# Altium PCB Headstage_Mainboard.PcbDoc
Units mil, origin at the board's own origin, x right, y up, seen from the top; angles counter-clockwise.
Board outline 4600 x 5400 mil, 4 copper layers (Top Copper Layer, Internal Copper Layer 1, Internal Copper Layer 2, Bottom Copper Layer), stack 62.205 mil thick; 16 components, 104 nets, 236 pads, 19 vias.
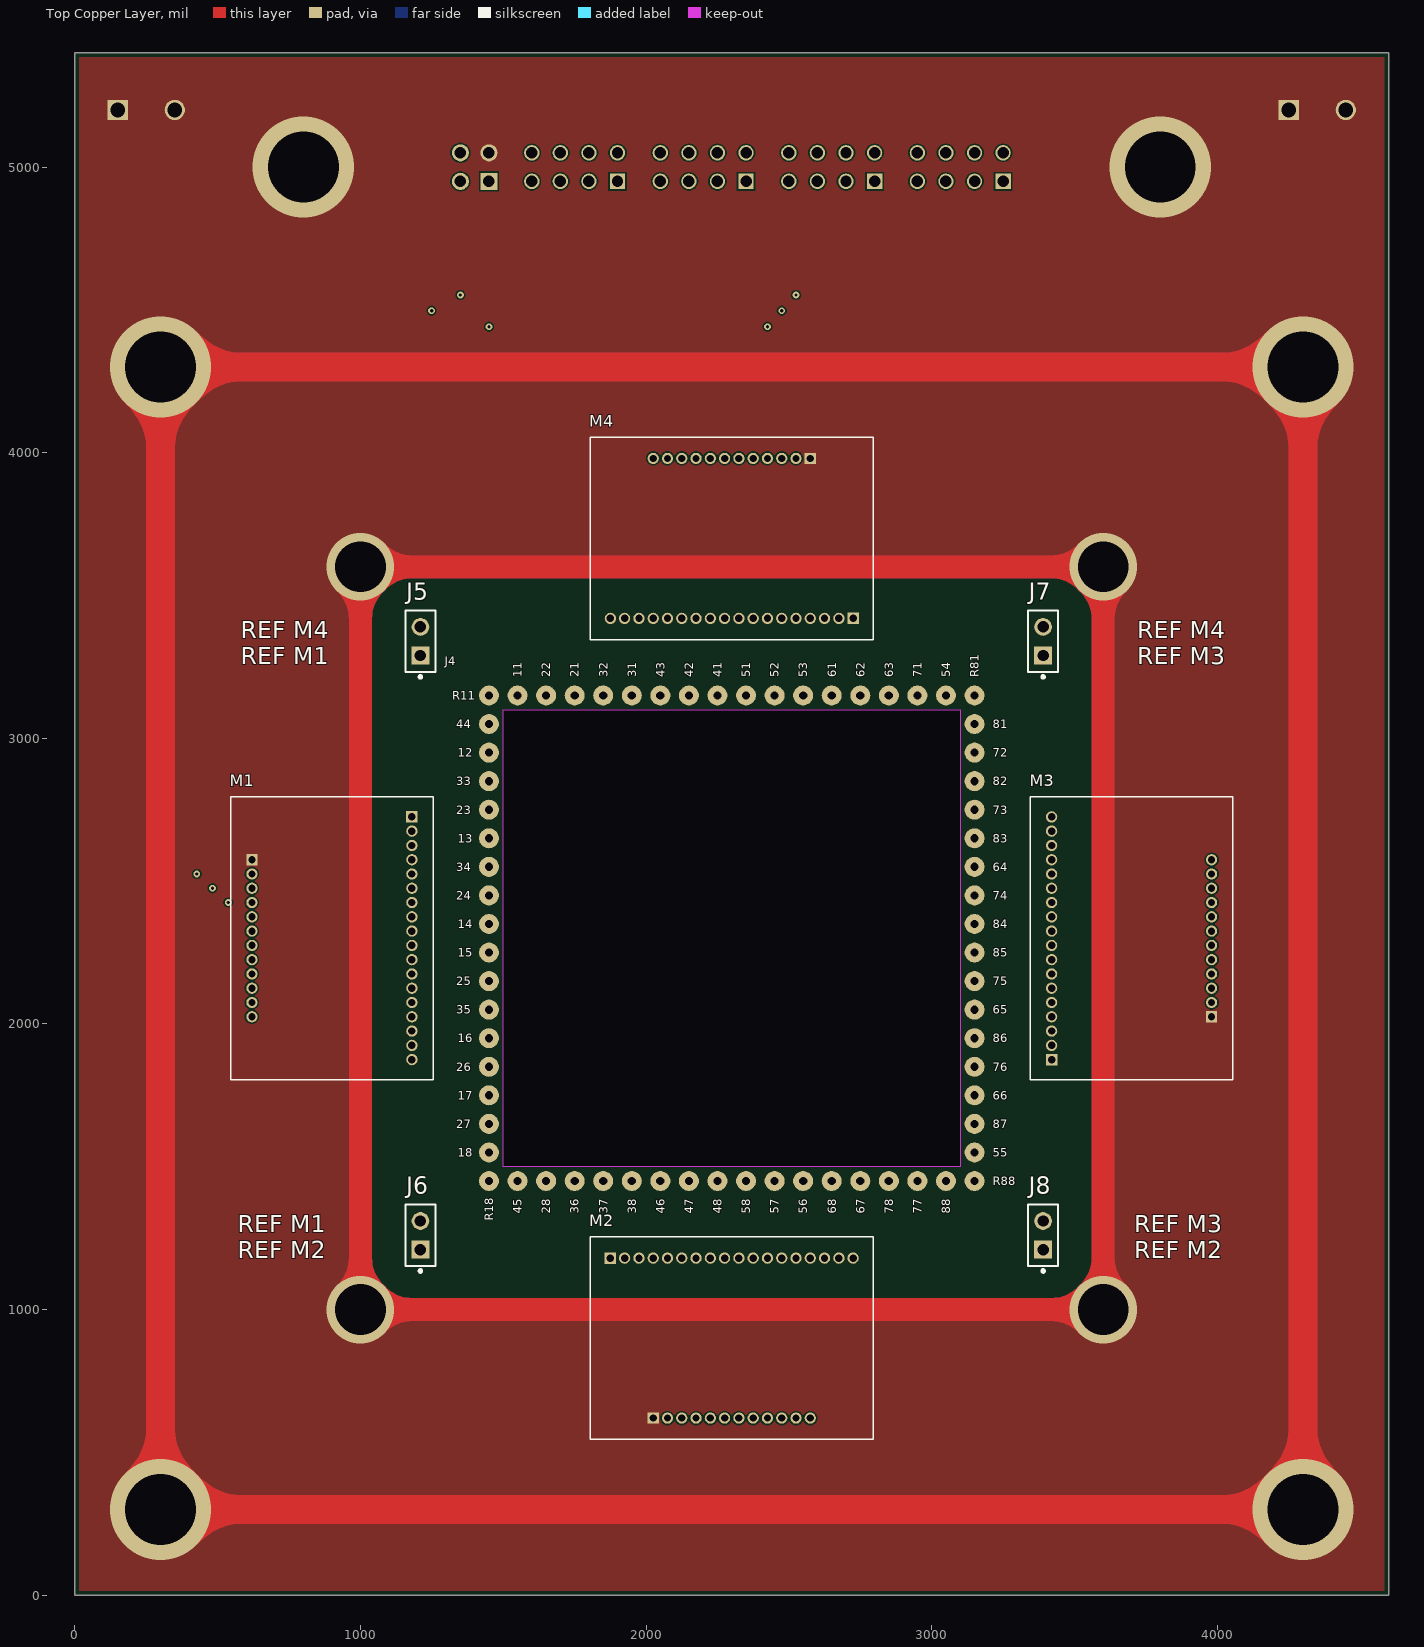
[diagram p0: Top Copper Layer view]
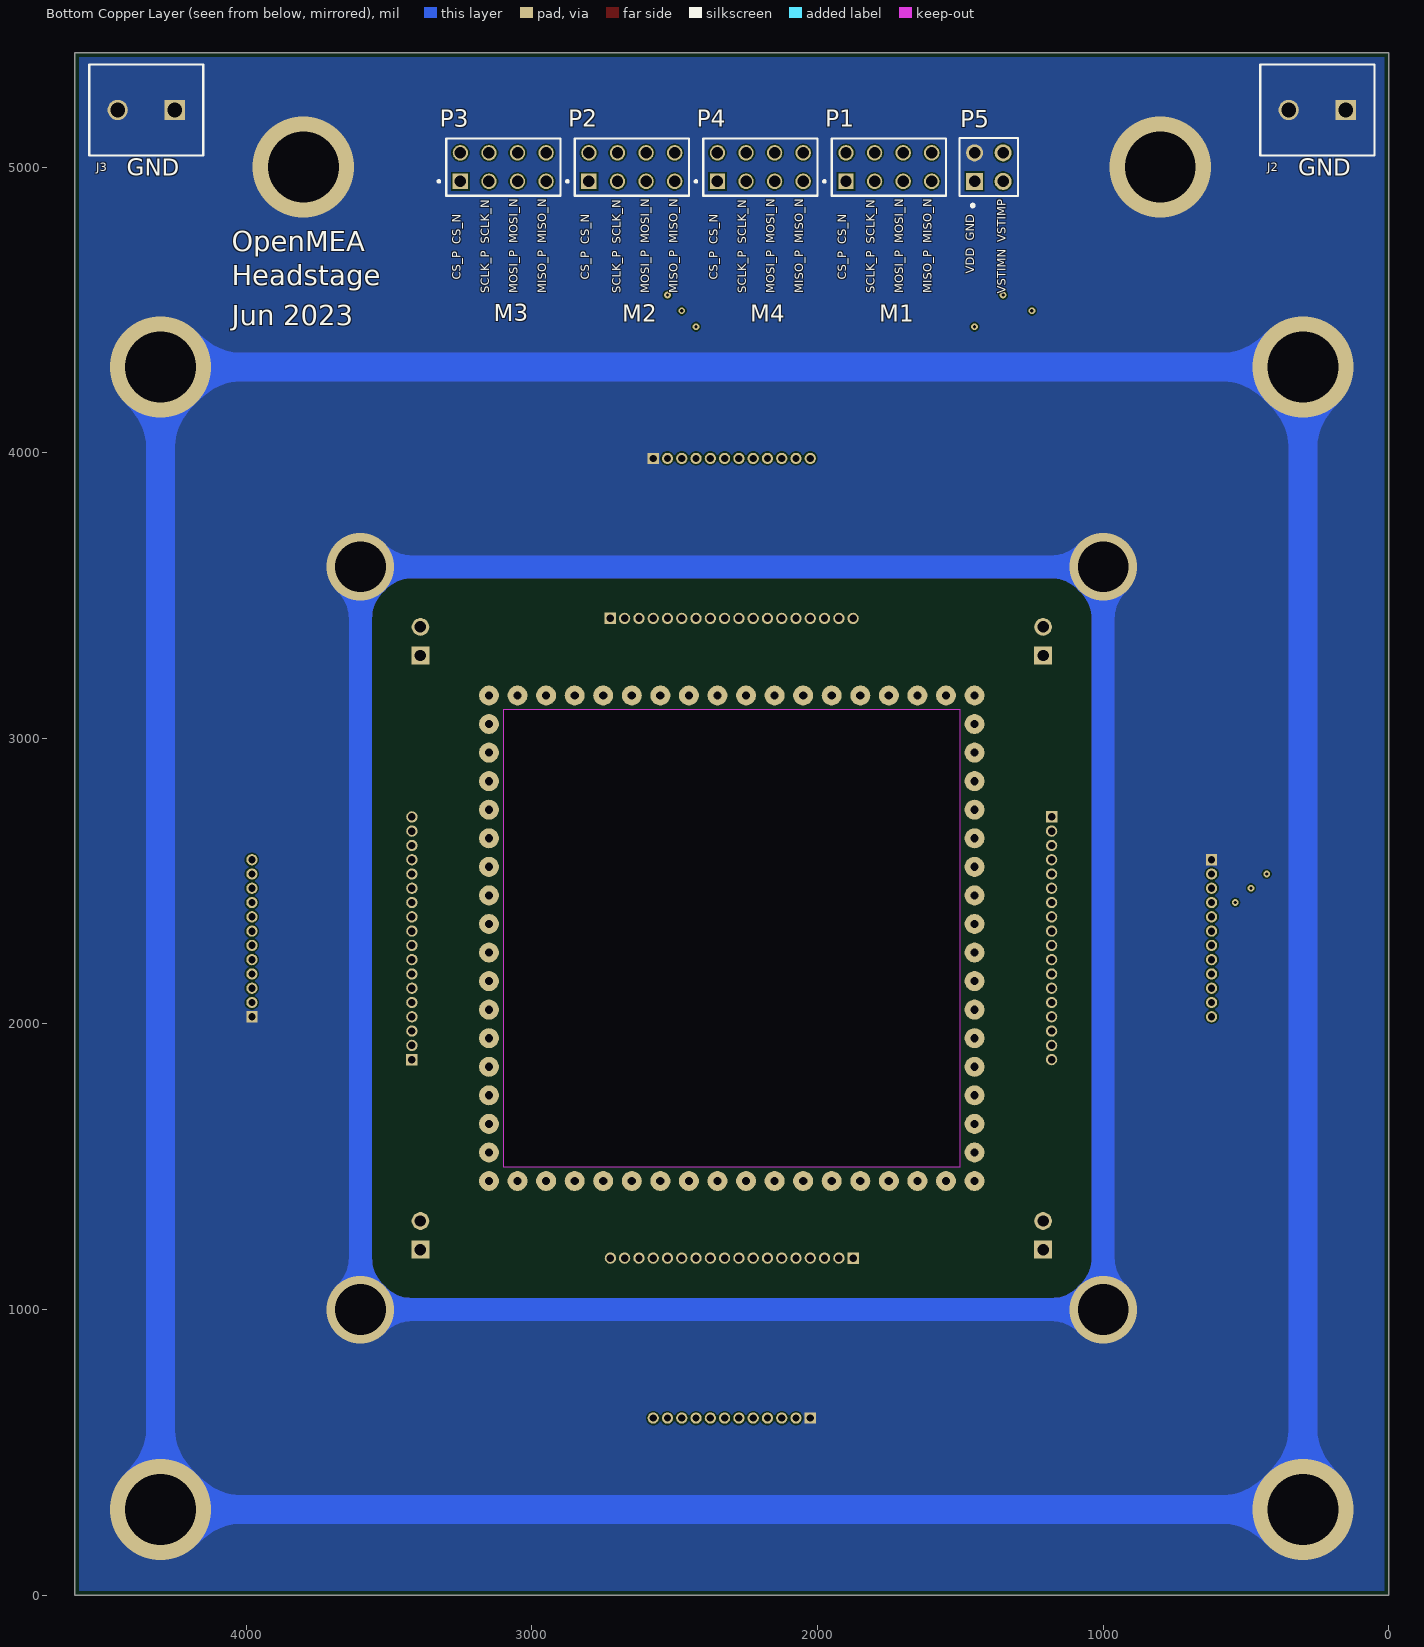
[diagram p1: Bottom Copper Layer view, seen from below]
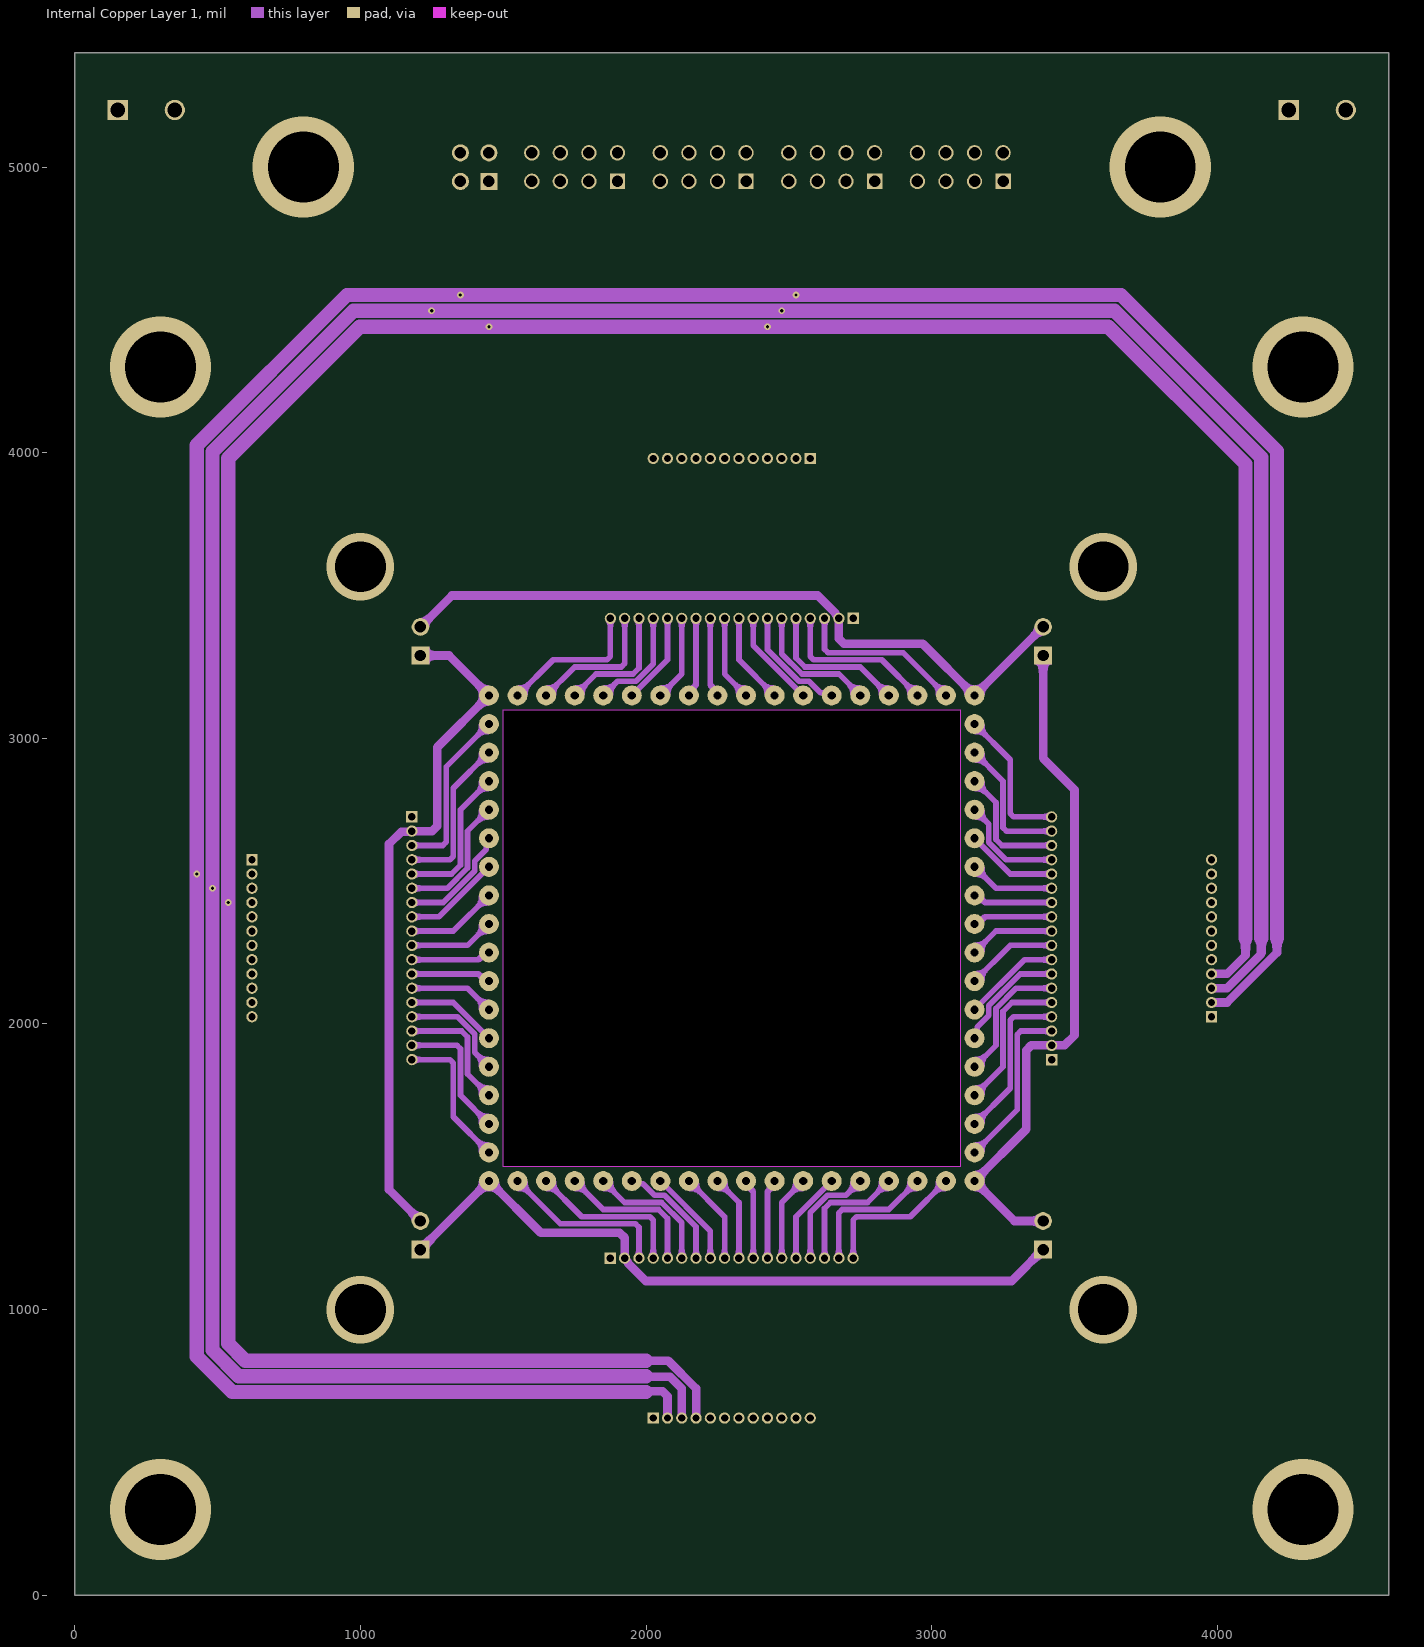
[diagram p2: Internal Copper Layer 1]
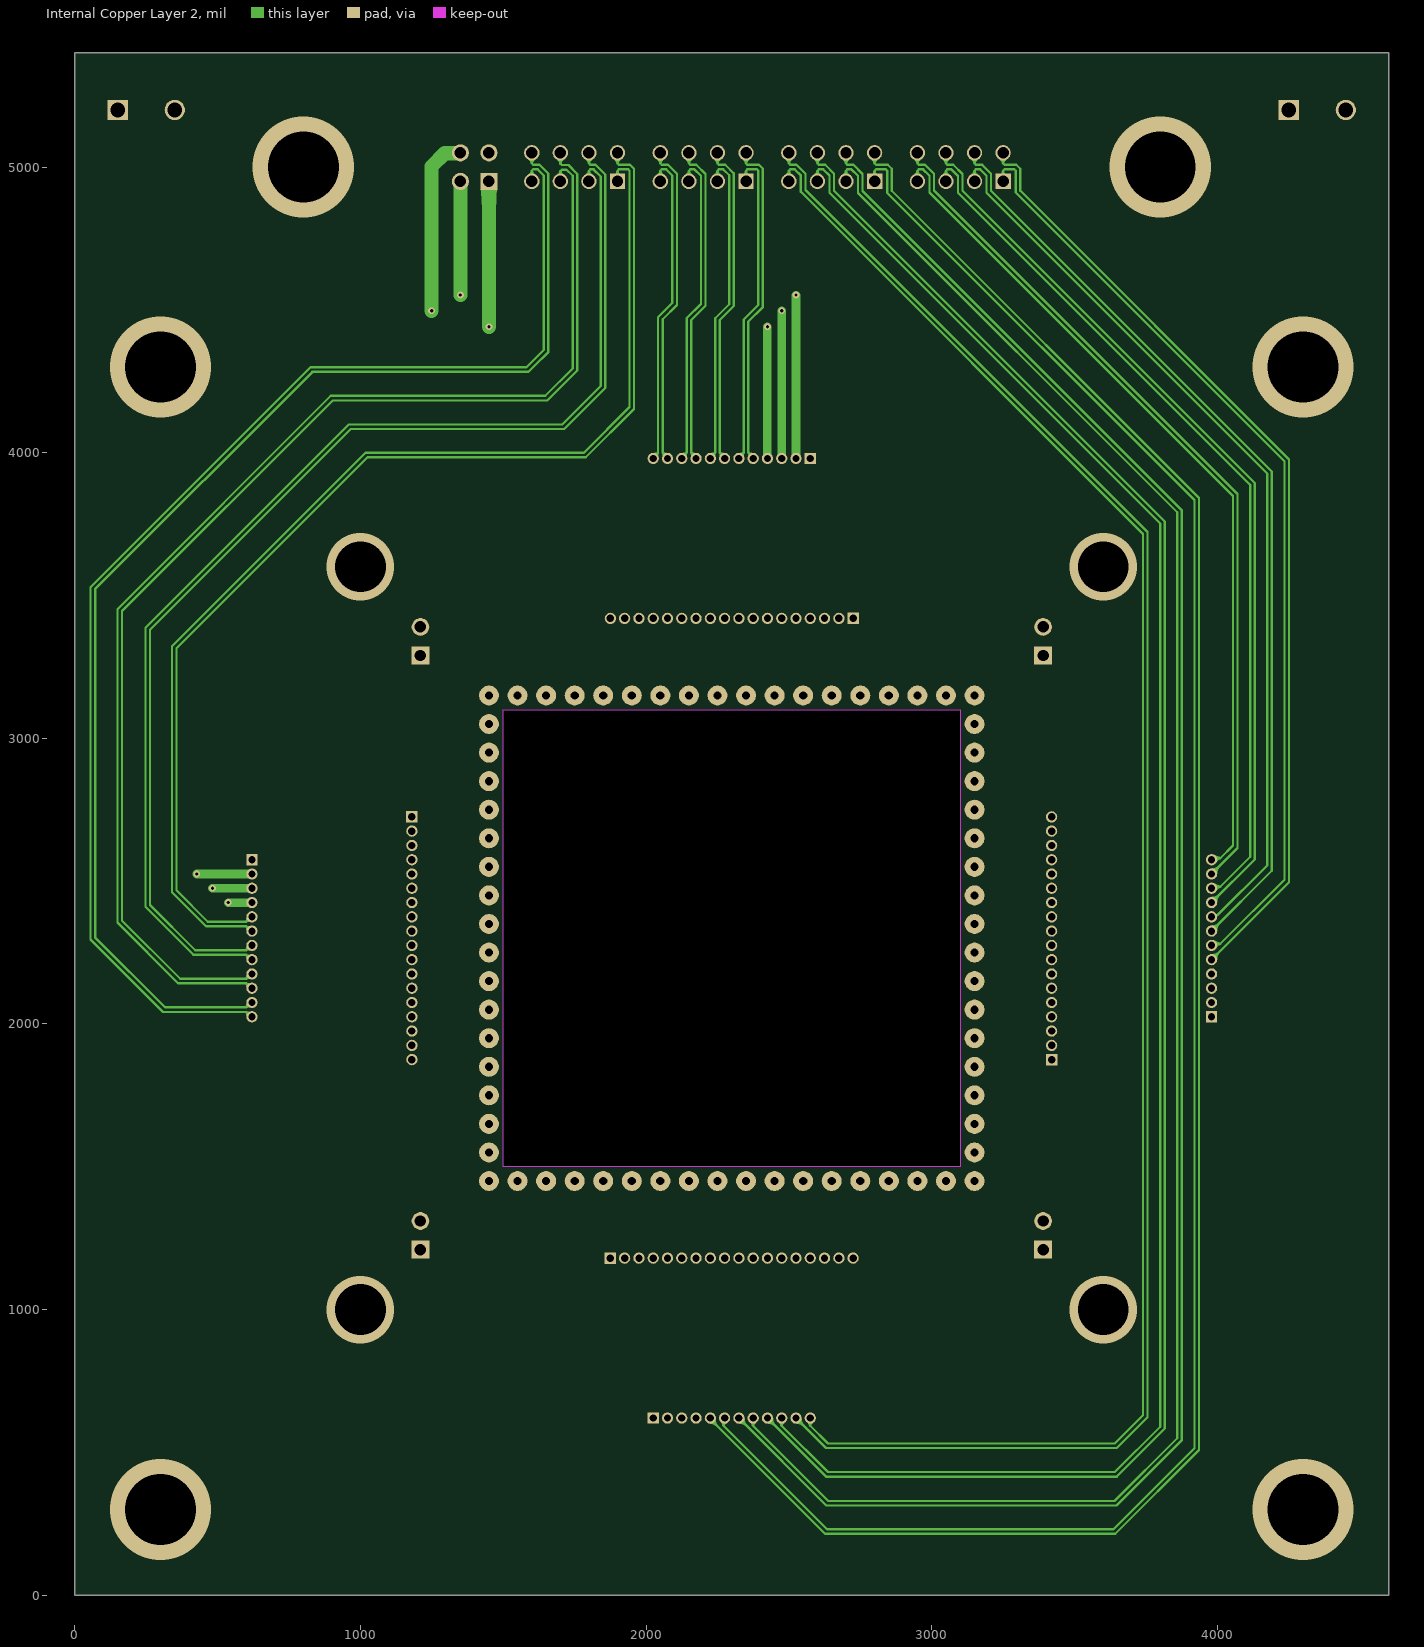
[diagram p3: Internal Copper Layer 2]

## Layer stack, top to bottom
Top Solder: solder mask 0.3937, Solder Resist, Dk 3.5
Top Copper Layer: signal copper 1.378
Dielectric 1: prepreg 8.6614, FR-4, Dk 4.2
Internal Copper Layer 1: signal copper 1.378
Dielectric 2: core 39.3701, FR-4, Dk 4.2
Internal Copper Layer 2: signal copper 1.378
Dielectric 3: prepreg 8.6614, FR-4, Dk 4.2
Bottom Copper Layer: signal copper 1.378
Bottom Solder: solder mask 0.3937, Solder Resist, Dk 3.5

## Board outline
0,0 4600,0 4600,5400 0,5400
cut-out: 1500,3100 3100,3100 3100,1500 1500,1500

## Design rules (kind name [scope] priority, off if disabled: settings)
BoardOutlineClearance [All] p1: gap=15 ignorepadtopadclearanceinfootprint=FALSE
Clearance [All] p1: gap=5 ignorepadtopadclearanceinfootprint=FALSE
ComponentClearance [All] p1: gap=5.91 collisioncheckmode=3 verticalgap=5.91 showdistances=FALSE
DiffPairsRouting [All] p1: maxlimit=8 minlimit=8 mostfreqgap=8 toplayer_minwidth=8 toplayer_maxwidth=8 toplayer_prefwidth=8 midlayer1_minwidth=8 midlayer1_maxwidth=8 midlayer1_prefwidth=8 midlayer2_minwidth=8 midlayer2_maxwidth=8 midlayer2_prefwidth=8 bottomlayer_minwidth=8 bottomlayer_maxwidth=8 bottomlayer_prefwidth=8 maxuncoupledlength=500
HoleSize [All] p1: absolutevalues=TRUE maxlimit=248.03 minlimit=9.84 maxpercent=80.000 minpercent=20.000
HoleToHoleClearance [All] p1: gap=17.72 allowstackedmicrovias=TRUE
MinimumAnnularRing [All] p1: minimumring=5.91
MinimumSolderMaskSliver [All] p1: minsoldermaskwidth=5.9
PlaneClearance [All] p1: clearance=5.91
PlaneConnect [All] p1: planeconnectstyle=Relief reliefexpansion=9.84 reliefentries=4 reliefconductorwidth=5.91 reliefairgap=5.91
PolygonConnect [All] p1: connectstyle=Direct reliefconductorwidth=5.91 reliefentries=4 polygonreliefangle="90 Angle" airgapwidth=5.91
RoomDefinition Headstage_Mainboard [InComponentClass('Headstage_Mainboard')] p1 off: confinementstyle=ConfineIn formatcopy=TRUE lockcomponents=FALSE outline 0,0 2000,0 2000,1000 0,1000
RoutingVias [All] p1: holewidth=9.84 width=21.65 viastyle="Through Hole" minholewidth=9.84 minwidth=21.65 maxholewidth=248.03 maxwidth=354.33
SilkToSilkClearance [All] p1: silktosilkclearance=5
SilkToSolderMaskClearance [IsPad] p1: minsilkscreentomaskgap=7.87 clearancetoexposedcopper=TRUE
SolderMaskExpansion [All] p1: expansion=0 istentingtop=FALSE
Width [All] p1: maxlimit=1968.5 minlimit=8 preferedwidth=8 minimp=50.000000 maximp=50.000000 favimp=50.000000
21 further rules are at their usual default settings.

## Classes and differential pairs
differential pair M4_SCLK: +M4_SCLK_P -M4_SCLK_N
differential pair M4_MOSI: +M4_MOSI_P -M4_MOSI_N
differential pair M4_MISO: +M4_MISO_P -M4_MISO_N
differential pair M4_CS: +M4_CS_P -M4_CS_N
differential pair M3_SCLK: +M3_SCLK_P -M3_SCLK_N
differential pair M3_MOSI: +M3_MOSI_P -M3_MOSI_N
differential pair M3_MISO: +M3_MISO_P -M3_MISO_N
differential pair M3_CS: +M3_CS_P -M3_CS_N
differential pair M2_SCLK: +M2_SCLK_P -M2_SCLK_N
differential pair M2_MOSI: +M2_MOSI_P -M2_MOSI_N
differential pair M2_MISO: +M2_MISO_P -M2_MISO_N
differential pair M2_CS: +M2_CS_P -M2_CS_N
differential pair M1_SCLK: +M1_SCLK_P -M1_SCLK_N
differential pair M1_MOSI: +M1_MOSI_P -M1_MOSI_N
differential pair M1_MISO: +M1_MISO_P -M1_MISO_N
differential pair M1_CS: +M1_CS_P -M1_CS_N

## Components (designator, comment, footprint, x,y, rotation, side; value= is the part's Value field where it differs from the comment)
J2 "1729128" PHOE-1729128-2_V 250,5200 r0 bottom
J3 "1729128" PHOE-1729128-2_V 4350,5200 r0 bottom
J4 "Pogo_Pins_64_4" Pogo_Pins_64_4 2300,2300 r0 top locked
J5 "TSW-102-07-F-S" FP-TSW-102-07-F-S-MFG 1210,3340 r90 top
J6 "TSW-102-07-F-S" FP-TSW-102-07-F-S-MFG 1210,1260 r90 top
J7 "TSW-102-07-F-S" FP-TSW-102-07-F-S-MFG 3390,3340 r90 top
J8 "TSW-102-07-F-S" FP-TSW-102-07-F-S-MFG 3390,1260 r90 top
M1 "Neural_Interface_Board" Neural_Interface_Board 900,2300 r270 top locked
M2 "Neural_Interface_Board" Neural_Interface_Board 2300,900 r0 top locked
M3 "Neural_Interface_Board" Neural_Interface_Board 3700,2300 r90 top locked
M4 "Neural_Interface_Board" Neural_Interface_Board 2300,3700 r180 top locked
P1 "TSW-104-07-F-D" SAMTEC_TSW-104-07-F-D 1750,5000 r180 bottom
P2 "TSW-104-07-F-D" SAMTEC_TSW-104-07-F-D 2650,5000 r180 bottom
P3 "TSW-104-07-F-D" SAMTEC_TSW-104-07-F-D 3100,5000 r180 bottom
P4 "TSW-104-07-F-D" SAMTEC_TSW-104-07-F-D 2200,5000 r180 bottom
P5 "HTSW-102-07-G-D" FP-HTSW-102-07-G-D-MFG 1400,5000 r180 bottom

## Footprints (in the part's own frame and the unit in brackets; to place one, negate y for a bottom-side part, rotate by r counter-clockwise, add the part's x,y. Pads: shape width x height; smd on the part's side, far side on the other; paste and mask are expansions set on the pad)
FP-HTSW-102-07-G-D-MFG [mm]
  rect 1.52x1.52 hole 1.02 paste-1000 mask+0: 1(-1.27,-1.27)
  round 1.52 hole 1.02 paste-1000 mask+0: 2(-1.27,1.27) 3(1.27,-1.27) 4(1.27,1.27)
  silkscreen extent -2.6,-3.54 2.6,2.58, body extent -2.55,-2.56 2.53,2.52, height 8.7
FP-TSW-102-07-F-S-MFG [mm]
  rect 1.57x1.57 hole 1.02 paste-1000 mask+0: 1(-1.27,0)
  round 1.57 hole 1.02 paste-1000 mask+0: 2(1.27,0)
  silkscreen extent -3.3,-1.34 2.73,1.34, body extent -2.83,-1.44 2.83,1.44, height 0.25
Neural_Interface_Board [mm]
  rect 1x1 hole 0.65: 1(-6.985,-7.112) 13(-10.795,7.112)
  round 1 hole 0.65: 2(-5.715,-7.112) 3(-4.445,-7.112) 4(-3.175,-7.112) 5(-1.905,-7.112) 6(-0.635,-7.112) 7(0.635,-7.112) 8(1.905,-7.112) 9(3.175,-7.112) 10(4.445,-7.112) 11(5.715,-7.112) 12(6.985,-7.112) 14(-9.525,7.112) 15(-8.255,7.112) 16(-6.985,7.112) 17(-5.715,7.112) 18(-4.445,7.112) 19(-3.175,7.112) 20(-1.905,7.112) 21(-0.635,7.112) 22(0.635,7.112) 23(1.905,7.112) 24(3.175,7.112) 25(4.445,7.112) 26(5.715,7.112) 27(6.985,7.112) 28(8.255,7.112) 29(9.525,7.112) 30(10.795,7.112)
  silkscreen extent -12.6,-9 12.6,9, body extent -12.07,-8.51 12.07,8.51, height 3.9
PHOE-1729128-2_V [mm] "Receptacle, 2-Leads, Body 8.1x10.16mm, Pitch 5.08mm"
  rect 1.8x1.8 hole 1.3: 1(-2.54,0)
  round 1.8 hole 1.3: 2(2.54,0)
  silkscreen extent -5.08,-4.05 5.08,4.05, body extent -5.65,-4.05 5.08,4.05, height 10.01
Pogo_Pins_64_4 [mil]
  round 70 hole 29: 11(-750,850) 12(-850,650) 13(-850,350) 14(-850,50) 15(-850,-50) 16(-850,-350) 17(-850,-550) 18(-850,-750) 21(-550,850) 22(-650,850) 23(-850,450) 24(-850,150) 25(-850,-150) 26(-850,-450) 27(-850,-650) 28(-650,-850) 31(-350,850) 32(-450,850) 33(-850,550) 34(-850,250) 35(-850,-250) 36(-550,-850) 37(-450,-850) 38(-350,-850) 41(-50,850) 42(-150,850) 43(-250,850) 44(-850,750) 45(-750,-850) 46(-250,-850) 47(-150,-850) 48(-50,-850) 51(50,850) 52(150,850) 53(250,850) 54(750,850) 55(850,-750) 56(250,-850) 57(150,-850) 58(50,-850) 61(350,850) 62(450,850) 63(550,850) 64(850,250) 65(850,-250) 66(850,-550) 67(450,-850) 68(350,-850) 71(650,850) 72(850,650) 73(850,450) 74(850,150) 75(850,-150) 76(850,-450) 77(650,-850) 78(550,-850) 81(850,750) 82(850,550) 83(850,350) 84(850,50) 85(850,-50) 86(850,-350) 87(850,-650) 88(750,-850) R11(-850,850) R18(-850,-850) R81(850,850) R88(850,-850)
  body extent -886,-886 886,886, height 303
SAMTEC_TSW-104-07-F-D [mm]
  rect 1.37x1.37 hole 1.02: 1(-3.81,-1.27)
  round 1.37 hole 1.02: 2(-3.81,1.27) 3(-1.27,-1.27) 4(-1.27,1.27) 5(1.27,-1.27) 6(1.27,1.27) 7(3.81,-1.27) 8(3.81,1.27)
  silkscreen extent -5.83,-2.54 5.08,2.54, body extent -5.08,-2.54 5.08,2.54, height 8.38

## Part data
J2 J3: library part CMP-2000-05815-1, "PCB Terminal Block, 13.5 A, 400 V, 2-Pin THD, RoHS, Bulk", Current Rating=13500mA, Manufacturer="Phoenix Contact", Package Description="2-Pin Through Hole Device, Body 8.1 x 10.16 mm, Pitch 5.08 mm", Package Reference=1729128-2, Package Version=03/2015, Voltage Rating=400V, Datasheet URL=https://datasheet.ciiva.com/16046/1729128-16046181.pdf, Datasheet Version=12/2013, Manufacturer URL=http://www.phoenixcontact.com/, Mounting Technology=ThroughHole, No. of Positions=2, No. of Rows=1, Orientation=Horizontal, Package URL=https://www.phoenixcontact.com/online/portal/pi/pxc/product_detail_page/!ut/p/b1/3VdJjqNKFDxLH8AFycySyWY2ozFsEPOMMQaDOX1XedGL_1Vdm5YXJleknhSKeBkvI6EA8ncAo3AYoDhBQGco6KN7VURTdemj9us_IEKEZo_YHiPAEWEFmDGOHMORkqKYCORBZxgL7ZoaZYcbFFUZ3fqxSY6GOuxydWUuHqz1ynmMFygu583Bob0Ewr6Sd_l-5m-kAueHiB0jpRwZwe58wwtkpxtMYd_LmGcDRU02dRNEyWt6Y2ti5pSyJ_reIkzIulrqApdnbT11V5jnCKbYNCvhEM1MCpPByat_X379-iThf08CI5GfOPqfBeS3BRoBOdD55AKVv0iLwCMq-2BrzXWSGRH7pUGD9uwXQjiph3xL0DKQwdGa0JImiIOmBNOestqgwTHSSs2oOep-78apyXQBvNi8ZLaFjvjWvcaUEBu0MC6Wbe-d6mB0FAebo2lUWinqYaZs5DAYzV0RP9yitUjnGJ0iI9xhZkT42OCQNUJJhkgWINNQLP2JFP6OpMg3JCVg70jqHT0lvKOnhHf0lPuOnnLf0VPuWx6_dxwUIvwk5WMkT0kLL1mh61l2yZVSzG3pYV_bqo-mj6uMKwKwdnnW8Jh5RTOJzMOA5c-eJDaZQw4mTMPH02PvS_ZAqNVjVTo2WyYLkwH_KU1mmmG5kjRhDqPXLwwVHvVOjCM60-fpXvTDfMGW1PVFVS1r4e4yVDk4ZdNbkUHvqPqQSeian4UD39fNKmachqdJ1NJbyk8rXT9mXTvPk3oE5meulKGgiruPJek-4I9hTT6G8ZLOyRSm2RRVbThERQad5OS28hdt4YW4vG0stgYYzsWsK4_7y6DZMjJSCqri1kyiZR5vD7pwIrNR7QwPHTcLTI5qT7eRlpHrdGiupYlqQDJ7zy_CND8fWWBoLRXxk1RVcXiBQwbTD4Xi7KL-FuO94t9xaqweXzH, Packing=Bulk, PartNumber=1729128, Pitch=5.08mm, RoHS=TRUE
J4: "Pogo pins, 64 recording electrodes, 4 reference electrodes"
J5 J6 J7 J8: library part CMP-02766-001458-1, "CONN HEADER VERT 2POS 2.54MM", Color=Black, Flammability Rating="UL94 V-0", Max Current Rating=7.6A, Max Operating Temperature=125°C, Max Voltage Rating (AC)=550V, Min Operating Temperature=-55°C, Package Quantity=1, Connector Type=Header, Contact Finish - Mating=GOLD, Contact Material=Bronze, Contact Mating Length=0.23inch, Contact Plating=Gold, Contact Shape=Square, Contact Type="Male Pin", Depth=2.54mm, Fastening Type=Pull, Gender=Male, Housing Color=Black, Housing Material=Polyester, Insulation Color=Black, Insulation Material=PBT, Length=5.08mm, Mount="Through Hole", Number Of Contacts=2, Number of Positions=2, Number Of Rows=1, Orientation=Straight, Packaging=Bulk, Pitch=2.54mm, Radiation Hardening=No, REACH SVHC="No SVHC", RoHS Compliant=Yes, Series=TSW, Termination=Solder
P1 P2 P3 P4: "Board Connector, 8 Contact(s), 2 Row(s), Male, Straight, 0.1 inch Pitch, Solder Terminal, Black Insulator", Flammability Rating="UL94 V-0", Insulation Color=Black, Manufacturer=Samtec, Additional Feature=E.L.P., Body Breadth=0.1inch, Body Depth=0.1inch, Body/Shell Style=RECEPTACLE, Category=Connectors, ComponentLink1Description=https://datasheet.ciiva.com:443/pdfs/VipMasterIC/IC/SAMI/SAMI-S-A0003531373/SAMI-S-A0003531373-1.pdf?src-supplier=IHS+Markit, ComponentLink1URL=https://datasheet.ciiva.com:443/pdfs/VipMasterIC/IC/SAMI/SAMI-S-A0003531373/SAMI-S-A0003531373-1.pdf?src-supplier=IHS+Markit, ComponentLink2Description=https://datasheet.ciiva.com/739/tsw-xxx-xx-xxx-x-xx-xxx-mkt-739906.pdf?src-supplier=Digi-Key, ComponentLink2URL=https://datasheet.ciiva.com/739/tsw-xxx-xx-xxx-x-xx-xxx-mkt-739906.pdf?src-supplier=Digi-Key, Connector Type="BOARD CONNECTOR", Contact Finish - Mating="GOLD FLASH OVER NICKEL (50)", Contact Finish - Termination="Matte Tin (Sn) - with Nickel (Ni) barrier", Contact Gender=Male, Contact Material=Bronze, Contact Pattern=RECTANGULAR, Contact Style="SQ PIN-SKT", DIN Conformance=No, Filter Feature=No, IEC Conformance=No, Insulation Material=Glass, JESD-609 Code=e3, Manufacturer Part Number=TSW-104-07-F-D, Mating Contact Pitch=0.1inch, Mating Contact Row Spacing=0.1inch, Mating Information="MULTIPLE MATING PARTS AVAILABLE", MIL Conformance=No, Mixed Contacts=No, Mounting Style=STRAIGHT, Mounting Technology=Board, Number Of Connectors=1, Number Of Contacts=8, Number Of PCB Rows=2, Number of Rows Loaded=2, Option="General Purpose", PCB Contact Pattern=RECTANGULAR, PCB Contact Row Spacing=5.08mm, Pricing="1=0.9123, 50=0.706, 100=0.5756 (USD)", Reach SVHC Compliant=Yes, Reference Standard=UL, Reliability=COMMERCIAL, RoHS=Yes, RoHS Compliant=Yes, Stock=1, Supplier="Arrow Electronics", Supplier Part Number=TSW-104-07-F-D, Terminal Length=0.1inch, Terminal Pitch=2.54mm, Termination=Solder
P5: library part CMP-02766-000010-1, "CONN HEADER VERT 4POS 2.54MM", Current Rating=6.3A, Manufacturer=Samtec, Temperature="-55°C to +125°C", Temperature Range High=+125°C, Temperature Range Low=-55°C, Voltage Rating=550V, Automotive=No, Category=Conn, ComponentLink2Description=Datasheet, ComponentLink2URL=http://suddendocs.samtec.com/catalog_english/htsw_th.pdf, Conn Gender=Male, Conn Orientation=Straight, Contact Material=Gold,Nickel, Device Class L1=Connectors, Device Class L2="Headers and Wire Housings", Device Class L3=unset, Digikey Description="CONN HEADER VERT 4POS 2.54MM", Height=8.71mm, Lead Free=Yes, Manufacturer Part Number=HTSW-102-07-G-D, Mouser Description="Conn Unshrouded Header HDR 4 POS 2.54mm Solder ST Thru-Hole Bag", Number Of Contacts=4, Number Of Rows=2, Octopart=https://octopart.com/htsw-102-07-g-d-samtec-10531767, Package=HTSW-102-07-G-D, Pitch=2.54mm, RoHS=TRUE

## Via types
v1: diameter 23.62, hole 11.81, Top Copper Layer to Bottom Copper Layer, tented both sides, 9 vias
v2: diameter 354.33, hole 248.03, Top Copper Layer to Bottom Copper Layer, 6 vias
v3: diameter 236.22, hole 177.17, Top Copper Layer to Bottom Copper Layer, 4 vias

## Nets (pads, with @x,y where several pads share a name; then routed paths per layer and width w, separated by ;. In a path a pad name is that pad's centre, name@x,y a point inside that pad or via, vN(x,y) a via of type N, cw(c..) or ccw(c..) an arc to the next point about the centre after c; other vN are vias at no path point)
E1_0: J4.44 M1.15 | length 600.3
  Internal Copper Layer 1 w20: M1.15 1288.28,2625 1300,2636.72 1300,2900 J4.44
E1_1: J4.12 M1.16 | length 564.9
  Internal Copper Layer 1 w20: M1.16 1313.28,2575 1325,2586.72 1325,2825 J4.12
E1_2: J4.33 M1.17 | length 518.2
  Internal Copper Layer 1 w20: M1.17 1318.93,2525 1350,2556.07 1350,2750 J4.33
E1_3: J4.23 M1.18 | length 459.6
  Internal Copper Layer 1 w20: M1.18 1304.29,2475 1375,2545.71 1375,2675 J4.23
E1_4: J4.13 M1.19 | length 401.1
  Internal Copper Layer 1 w20: M1.19 1289.64,2425 1400,2535.36 1400,2570.71 1440.43,2611.14 1440.43,2640.43 J4.13
E1_5: J4.34 M1.20 | length 342.5
  Internal Copper Layer 1 w20: M1.20 1275,2375 J4.34
E1_6: J4.24 M1.21 | length 321.8
  Internal Copper Layer 1 w20: M1.21 1325,2325 J4.24
E1_7: J4.14 M1.22 | length 301.1
  Internal Copper Layer 1 w20: M1.22 1375,2275 J4.14
E1_8: J4.15 M1.23 | length 280.4
  Internal Copper Layer 1 w20: M1.23 1413.28,2225 1438.28,2250 J4.15
E1_9: J4.25 M1.24 | length 280.4
  Internal Copper Layer 1 w20: M1.24 1412.28,2175 1437.28,2150 J4.25
E1_10: J4.35 M1.25 | length 301.1
  Internal Copper Layer 1 w20: M1.25 1375,2125 J4.35
E1_11: J4.16 M1.26 | length 321.8
  Internal Copper Layer 1 w20: M1.26 1325,2075 J4.16
E1_12: J4.26 M1.27 | length 380.4
  Internal Copper Layer 1 w20: M1.27 1339.64,2025 1400,1964.64 1400,1900 J4.26
E1_13: J4.17 M1.28 | length 438.9
  Internal Copper Layer 1 w20: M1.28 1354.29,1975 1375,1954.29 1375,1825 J4.17
E1_14: J4.27 M1.29 | length 479.6
  Internal Copper Layer 1 w20: M1.29 1338.28,1925 1350,1913.28 1350,1750 J4.27
E1_15: J4.18 M1.30 | length 514.9
  Internal Copper Layer 1 w20: M1.30 1313.28,1875 1325,1863.28 1325,1675 J4.18
E1_REF: J4.R11 J5.1 J6.2 M1.14 | length 2390.9
  Internal Copper Layer 1 w30: J6.2 1100,1420 1100,2630 1143.21,2673.21 1178.21,2673.21 M1.14 1251.43,2675 1269,2692.57 1269,2969 J4.R11 1310,3290 J5.1
E2_0: J4.45 M2.15 | length 600.3
  Internal Copper Layer 1 w20: J4.45 1700,1300 1963.28,1300 1975,1288.28 M2.15
E2_1: J4.28 M2.16 | length 564.9
  Internal Copper Layer 1 w20: J4.28 1775,1325 2013.28,1325 2025,1313.28 M2.16
E2_2: J4.36 M2.17 | length 518.2
  Internal Copper Layer 1 w20: J4.36 1850,1350 2043.93,1350 2075,1318.93 M2.17
E2_3: J4.37 M2.18 | length 459.6
  Internal Copper Layer 1 w20: J4.37 1925,1375 2054.29,1375 2125,1304.29 M2.18
E2_4: J4.38 M2.19 | length 401.1
  Internal Copper Layer 1 w20: J4.38 1959.57,1440.43 1988.86,1440.43 2029.29,1400 2064.64,1400 2175,1289.64 M2.19
E2_5: J4.46 M2.20 | length 342.5
  Internal Copper Layer 1 w20: J4.46 2225,1275 M2.20
E2_6: J4.47 M2.21 | length 321.8
  Internal Copper Layer 1 w20: J4.47 2275,1325 M2.21
E2_7: J4.48 M2.22 | length 301.1
  Internal Copper Layer 1 w20: J4.48 2325,1375 M2.22
E2_8: J4.58 M2.23 | length 280.4
  Internal Copper Layer 1 w20: J4.58 2350,1438.28 2375,1413.28 M2.23
E2_9: J4.57 M2.24 | length 280.4
  Internal Copper Layer 1 w20: M2.24 2425,1412.28 2450,1437.28 J4.57
E2_10: J4.56 M2.25 | length 301.1
  Internal Copper Layer 1 w20: M2.25 2475,1375 J4.56
E2_11: J4.68 M2.26 | length 321.8
  Internal Copper Layer 1 w20: M2.26 2525,1325 J4.68
E2_12: J4.67 M2.27 | length 380.4
  Internal Copper Layer 1 w20: M2.27 2575,1339.64 2635.36,1400 2700,1400 J4.67
E2_13: J4.78 M2.28 | length 438.9
  Internal Copper Layer 1 w20: M2.28 2625,1354.29 2645.71,1375 2775,1375 J4.78
E2_14: J4.77 M2.29 | length 479.6
  Internal Copper Layer 1 w20: M2.29 2675,1338.28 2686.72,1350 2850,1350 J4.77
E2_15: J4.88 M2.30 | length 514.9
  Internal Copper Layer 1 w20: M2.30 2725,1313.28 2736.72,1325 2925,1325 J4.88
E2_REF: J4.R18 J6.1 J8.1 M2.14 | length 2515.4
  Internal Copper Layer 1 w30: J6.1 J4.R18 1631,1269 1907.43,1269 1925,1251.43 M2.14 1925,1177.46 1935.31,1167.15 1935.31,1163.56 1998.88,1100 3280,1100 J8.1
E3_0: J4.55 M3.15 | length 600.3
  Internal Copper Layer 1 w20: J4.55 3300,1700 3300,1963.28 3311.72,1975 M3.15
E3_1: J4.87 M3.16 | length 564.9
  Internal Copper Layer 1 w20: J4.87 3275,1775 3275,2013.28 3286.72,2025 M3.16
E3_2: J4.66 M3.17 | length 518.2
  Internal Copper Layer 1 w20: J4.66 3250,1850 3250,2043.93 3281.07,2075 M3.17
E3_3: J4.76 M3.18 | length 459.6
  Internal Copper Layer 1 w20: J4.76 3225,1925 3225,2054.29 3295.71,2125 M3.18
E3_4: J4.86 M3.19 | length 401.1
  Internal Copper Layer 1 w20: J4.86 3159.57,1959.57 3159.57,1988.86 3200,2029.29 3200,2064.64 3310.36,2175 M3.19
E3_5: J4.65 M3.20 | length 342.5
  Internal Copper Layer 1 w20: J4.65 3325,2225 M3.20
E3_6: J4.75 M3.21 | length 321.8
  Internal Copper Layer 1 w20: J4.75 3275,2275 M3.21
E3_7: J4.85 M3.22 | length 301.1
  Internal Copper Layer 1 w20: J4.85 3225,2325 M3.22
E3_8: J4.84 M3.23 | length 280.4
  Internal Copper Layer 1 w20: J4.84 3161.72,2350 3186.72,2375 M3.23
E3_9: J4.74 M3.24 | length 280.4
  Internal Copper Layer 1 w20: J4.74 3162.72,2450 3187.72,2425 M3.24
E3_10: J4.64 M3.25 | length 301.1
  Internal Copper Layer 1 w20: J4.64 3225,2475 M3.25
E3_11: J4.83 M3.26 | length 321.8
  Internal Copper Layer 1 w20: J4.83 3275,2525 M3.26
E3_12: J4.73 M3.27 | length 380.4
  Internal Copper Layer 1 w20: J4.73 3200,2700 3200,2635.36 3260.36,2575 M3.27
E3_13: J4.82 M3.28 | length 438.9
  Internal Copper Layer 1 w20: J4.82 3225,2775 3225,2645.71 3245.71,2625 M3.28
E3_14: J4.72 M3.29 | length 479.6
  Internal Copper Layer 1 w20: J4.72 3250,2850 3250,2686.72 3261.72,2675 M3.29
E3_15: J4.81 M3.30 | length 514.9
  Internal Copper Layer 1 w20: J4.81 3275,2925 3275,2736.72 3286.72,2725 M3.30
E3_REF: J4.R88 J7.1 J8.2 M3.14 | length 2396.7
  Internal Copper Layer 1 w30: J8.2 3290,1310 J4.R88 3331,1631 3331,1907.43 3348.57,1925 M3.14 3465,1925 3500,1960 3500,2820 3390,2930 J7.1
E4_0: J4.54 M4.15 | length 600.3
  Internal Copper Layer 1 w20: M4.15 2625,3311.72 2636.72,3300 2900,3300 J4.54
E4_1: J4.71 M4.16 | length 564.9
  Internal Copper Layer 1 w20: M4.16 2575,3286.72 2586.72,3275 2825,3275 J4.71
E4_2: J4.63 M4.17 | length 518.2
  Internal Copper Layer 1 w20: M4.17 2525,3281.07 2556.07,3250 2750,3250 J4.63
E4_3: J4.62 M4.18 | length 459.6
  Internal Copper Layer 1 w20: M4.18 2475,3295.71 2545.71,3225 2675,3225 J4.62
E4_4: J4.61 M4.19 | length 401.1
  Internal Copper Layer 1 w20: M4.19 2425,3310.36 2535.36,3200 2570.71,3200 2611.14,3159.57 2640.43,3159.57 J4.61
E4_5: J4.53 M4.20 | length 342.5
  Internal Copper Layer 1 w20: M4.20 2375,3325 J4.53
E4_6: J4.52 M4.21 | length 321.8
  Internal Copper Layer 1 w20: M4.21 2325,3275 J4.52
E4_7: J4.51 M4.22 | length 301.1
  Internal Copper Layer 1 w20: M4.22 2275,3225 J4.51
E4_8: J4.41 M4.23 | length 280.4
  Internal Copper Layer 1 w20: M4.23 2225,3186.72 2250,3161.72 J4.41
E4_9: J4.42 M4.24 | length 280.4
  Internal Copper Layer 1 w20: J4.42 2150,3162.72 2175,3187.72 M4.24
E4_10: J4.43 M4.25 | length 301.1
  Internal Copper Layer 1 w20: J4.43 2125,3225 M4.25
E4_11: J4.31 M4.26 | length 321.8
  Internal Copper Layer 1 w20: J4.31 2075,3275 M4.26
E4_12: J4.32 M4.27 | length 380.4
  Internal Copper Layer 1 w20: J4.32 1900,3200 1964.64,3200 2025,3260.36 M4.27
E4_13: J4.21 M4.28 | length 438.9
  Internal Copper Layer 1 w20: J4.21 1825,3225 1954.29,3225 1975,3245.71 M4.28
E4_14: J4.22 M4.29 | length 479.6
  Internal Copper Layer 1 w20: J4.22 1750,3250 1913.28,3250 1925,3261.72 M4.29
E4_15: J4.11 M4.30 | length 514.9
  Internal Copper Layer 1 w20: J4.11 1675,3275 1863.28,3275 1875,3286.72 M4.30
E4_REF: J4.R81 J5.2 J7.2 M4.14 | length 2515.4
  Internal Copper Layer 1 w30: J5.2 1320,3500 2601.12,3500 2664.69,3436.44 2664.69,3432.85 2675,3422.54 M4.14 2675,3348.57 2692.57,3331 2969,3331 J4.R81 J7.2
GND: J2.1 J2.2 J3.1 J3.2 M1.1 M2.1 M3.1 M4.1 P5.2 | length 52800
  Top Copper Layer w80: v3(1000,1000) v3(1000,3600) v3(3600,3600) v3(3600,1000) v3(1000,1000)
  Top Copper Layer w100: v2(300,300) v2(300,4300) v2(4300,4300) v2(4300,300) v2(300,300)
  Bottom Copper Layer w80: v3(1000,1000) v3(1000,3600) v3(3600,3600) v3(3600,1000) v3(1000,1000)
  Bottom Copper Layer w100: v2(300,300) v2(300,4300) v2(4300,4300) v2(4300,300) v2(300,300)
  other v2: 800,5000 3800,5000
M1_CS_N: M1.5 P1.2 | length 4057.4
  Internal Copper Layer 2 w8: M1.5 616.63,2375 599.63,2358 465.63,2358 356,2467.63 356,3315.69 1024.31,3984 1789,3984 1958,4153 1958,4993.94 1943.94,5008 1904.69,5008 1900,5012.69 P1.2
M1_CS_P: M1.6 P1.1 | length 4057.4
  Internal Copper Layer 2 w8: M1.6 616.63,2325 599.63,2342 459,2342 340,2461 340,3322.31 1017.69,4000 1782.37,4000 1942,4159.63 1942,4987.31 1937.31,4992 1904.69,4992 1900,4987.31 P1.1
M1_MISO_N: M1.11 P1.8 | length 4542.3
  Internal Copper Layer 2 w8: M1.11 616.63,2075 599.63,2058 315.63,2058 71,2302.63 71,3522.37 831.63,4283 1587.78,4283 1594.79,4289.88 1610.35,4305.16 1658,4352.82 1658,4977 1627,5008 1604.69,5008 1600,5012.69 P1.8
M1_MISO_P: M1.12 P1.7 | length 4542.3
  Internal Copper Layer 2 w8: M1.12 616.63,2025 599.63,2042 309,2042 55,2296 55,3529 825,4299 1581.24,4299 1599.08,4316.53 1642,4359.44 1642,4970.37 1620.37,4992 1604.69,4992 1600,4987.31 P1.7
M1_MOSI_N: M1.9 P1.6 | length 4373.3
  Internal Copper Layer 2 w8: M1.9 616.63,2175 599.63,2158 368.63,2158 165,2361.63 165,3445.37 902.63,4183 1654,4183 1759,4288 1759,4976 1728,5007 1704.69,5007 1700,5011.69 P1.6
M1_MOSI_P: M1.10 P1.5 | length 4371.3
  Internal Copper Layer 2 w8: M1.10 616.63,2125 599.63,2142 362,2142 149,2355 149,3452 896,4199 1647.37,4199 1743,4294.63 1743,4969.37 1721.37,4991 1704.69,4991 1700,4986.31 P1.5
M1_SCLK_N: M1.7 P1.4 | length 4195.7
  Internal Copper Layer 2 w8: M1.7 616.63,2275 599.63,2258 421.63,2258 263,2416.63 263,3380.37 965.63,4083 1713.37,4083 1857,4226.63 1857,4974 1823,5008 1804.69,5008 1800,5012.69 P1.4
M1_SCLK_P: M1.8 P1.3 | length 4195.7
  Internal Copper Layer 2 w8: M1.8 616.63,2225 599.63,2242 415,2242 247,2410 247,3387 959,4099 1706.75,4099 1841,4233.25 1841,4967.37 1816.37,4992 1804.69,4992 1800,4987.31 P1.3
M2_CS_N: M2.5 P2.2 | length 7038.8
  Internal Copper Layer 2 w8: M2.5 2225,616.63 2626.63,215 3643,215 3936,508 3936,3841 2860,4917 2860,4993.94 2845.94,5008 2804.69,5008 2800,5012.69 P2.2
M2_CS_P: M2.6 P2.1 | length 6948.3
  Internal Copper Layer 2 w8: M2.6 2271.25,616.25 2271.25,593 2633.26,231 3636.37,231 3920,514.63 3920,3834.37 2844,4910.37 2844,4987.31 2839.31,4992 2804.69,4992 2800,4987.31 P2.1
M2_MISO_N: M2.11 P2.8 | length 6279.6
  Internal Copper Layer 2 w8: P2.8 2500,5012.69 2504.69,5008 2527,5008 2558,4977 2558,4920 3756,3722 3756,623 3648,515 2630,515 M2.11
M2_MISO_P: M2.12 P2.7 | length 6186.2
  Internal Copper Layer 2 w8: P2.7 2500,4987.31 2504.69,4992 2520.37,4992 2542,4970.37 2542,4913.37 3740,3715.37 3740,629.63 3641.37,531 2636.63,531 2574.63,593 2574.63,619.63 M2.12
M2_MOSI_N: M2.9 P2.6 | length 6529
  Internal Copper Layer 2 w8: M2.9 2630,415 3647.63,415 3816,583.37 3816,3759 2658,4917 2658,4977 2627,5008 2604.69,5008 2600,5012.69 P2.6
M2_MOSI_P: M2.10 P2.5 | length 6435.7
  Internal Copper Layer 2 w8: M2.10 2474.63,619.63 2474.63,593 2636.63,431 3641,431 3800,590 3800,3752.37 2642,4910.37 2642,4970.37 2620.37,4992 2604.69,4992 2600,4987.31 P2.5
M2_SCLK_N: M2.7 P2.4 | length 6779.2
  Internal Copper Layer 2 w8: M2.7 2631,314 3647,314 3876,543 3876,3798 2758,4916 2758,4976 2726,5008 2704.69,5008 2700,5012.69 P2.4
M2_SCLK_P: M2.8 P2.3 | length 6685.9
  Internal Copper Layer 2 w8: M2.8 2374.63,619.63 2374.63,593 2637.63,330 3640.37,330 3860,549.63 3860,3791.37 2742,4909.37 2742,4969.37 2719.37,4992 2704.69,4992 2700,4987.31 P2.3
M3_CS_N: M3.5 P3.2 | length 3376
  Internal Copper Layer 2 w8: P3.2 3250,5012.69 3254.69,5008 3295.94,5008 3310,4993.94 3310,4917.63 4251,3976.63 4251,2496 M3.5
M3_CS_P: M3.6 P3.1 | length 3307.6
  Internal Copper Layer 2 w8: P3.1 3250,4987.31 3254.69,4992 3289.31,4992 3294,4987.31 3294,4911 4235,3970 4235,2505 4010.43,2280.43 3985.43,2280.43 M3.6
M3_MISO_N: M3.11 P3.8 | length 3039.9
  Internal Copper Layer 2 w8: P3.8 2950,5012.69 2954.69,5008 2976.63,5008 3008,4976.63 3008,4918 4071,3855 4071,2616 M3.11
M3_MISO_P: M3.12 P3.7 | length 2971.4
  Internal Copper Layer 2 w8: P3.7 2950,4987.31 2954.69,4992 2970,4992 2992,4970 2992,4911.37 4055,3848.37 4055,2625 4010.43,2580.43 3985.43,2580.43 M3.12
M3_MOSI_N: M3.9 P3.6 | length 3147.6
  Internal Copper Layer 2 w8: P3.6 3050,5012.69 3054.69,5008 3075.63,5008 3108,4975.63 3108,4917 4131,3894 4131,2576 M3.9
M3_MOSI_P: M3.10 P3.5 | length 3079.1
  Internal Copper Layer 2 w8: P3.5 3050,4987.31 3054.69,4992 3069,4992 3092,4969 3092,4910.37 4115,3887.37 4115,2585 4010.43,2480.43 3985.43,2480.43 M3.10
M3_SCLK_N: M3.7 P3.4 | length 3256.4
  Internal Copper Layer 2 w8: P3.4 3150,5012.69 3154.69,5008 3176.63,5008 3208,4976.63 3208,4917 4191,3934 4191,2536 M3.7
M3_SCLK_P: M3.8 P3.3 | length 3182.1
  Internal Copper Layer 2 w8: P3.3 3150,4987.31 3154.69,4992 3170,4992 3192,4970 3192,4910.37 4175,3927.37 4175,2555 4001,2381 3986,2381 M3.8
M4_CS_N: M4.5 P4.2 | length 1146.2
  Internal Copper Layer 2 w8: P4.2 2350,5012.69 2354.69,5008 2394.94,5008 2409,4993.94 2409,4510.37 2358,4459.37 2358,4000.37 2375,3983.37 M4.5
M4_CS_P: M4.6 P4.1 | length 1119.7
  Internal Copper Layer 2 w8: M4.6 2325,3983.37 2342,4000.37 2342,4466 2393,4517 2393,4987.31 2388.31,4992 2354.69,4992 2350,4987.31 P4.1
M4_MISO_N: M4.11 P4.8 | length 1134.8
  Internal Copper Layer 2 w8: P4.8 2050,5012.69 2054.69,5008 2077,5008 2108,4977 2108,4517.37 2058,4467.37 2058,4000.37 2075,3983.37 M4.11
M4_MISO_P: M4.12 P4.7 | length 1108.3
  Internal Copper Layer 2 w8: M4.12 2025,3983.37 2042,4000.37 2042,4474 2092,4524 2092,4970.37 2070.37,4992 2054.69,4992 2050,4987.31 P4.7
M4_MOSI_N: M4.9 P4.6 | length 1134.3
  Internal Copper Layer 2 w8: P4.6 2150,5012.69 2154.69,5008 2176,5008 2208,4976 2208,4514.37 2158,4464.37 2158,4000.37 2175,3983.37 M4.9
M4_MOSI_P: M4.10 P4.5 | length 1107.8
  Internal Copper Layer 2 w8: M4.10 2125,3983.37 2142,4000.37 2142,4471 2192,4521 2192,4969.37 2169.37,4992 2154.69,4992 2150,4987.31 P4.5
M4_SCLK_N: M4.7 P4.4 | length 1134
  Internal Copper Layer 2 w8: P4.4 2250,5012.69 2254.69,5008 2277,5008 2307,4978 2307,4513.37 2258,4464.37 2258,4000.37 2275,3983.37 M4.7
M4_SCLK_P: M4.8 P4.3 | length 1107.5
  Internal Copper Layer 2 w8: M4.8 2225,3983.37 2242,4000.37 2242,4471 2291,4520 2291,4971.37 2270.37,4992 2254.69,4992 2250,4987.31 P4.3
VDD: M1.4 M2.4 M3.4 M4.4 P5.1 | length 11776.7
  Internal Copper Layer 1 w30: 2001,821 2078,821 2175,724 M2.4 ; M3.4 4034,2175 4099,2240 4099,2300
  Internal Copper Layer 1 w50: 2000,821 597,821 537,881 v1(537,2425) 537,3980.44 997.56,4441 v1(1450,4441) v1(2425,4441) 3618.44,4441 4099,3960.44 4099,2300
  Internal Copper Layer 2 w30: v1(537,2425) M1.4 ; M4.4 v1(2425,4441)
  Internal Copper Layer 2 w50: v1(1450,4441) P5.1
VSTIMN: M1.2 M2.2 M3.2 M4.2 P5.3 | length 12427.3
  Internal Copper Layer 1 w30: 1988,714 2057.43,714 2075,696.43 M2.2 ; M3.2 4034,2075 4209,2250 4209,2300
  Internal Copper Layer 1 w50: 2000,711 551.44,711 427,835.44 v1(427,2525) 427,4026 953,4552 v1(1350,4552) v1(2525,4552) 3663,4552 4209,4006 ; 4209,2300 4209,4001
  Internal Copper Layer 2 w30: v1(427,2525) M1.2 ; M4.2 v1(2525,4552)
  Internal Copper Layer 2 w50: v1(1350,4552) P5.3
VSTIMP: M1.3 M2.3 M3.3 M4.3 P5.4 | length 12281.3
  Internal Copper Layer 1 w30: 1998,765 2084,765 2125,724 M2.3 ; M3.3 4034,2125 4154,2245 4154,2300
  Internal Copper Layer 1 w50: 2000,766 574.22,766 482,858.22 v1(482,2475) 482,4003.22 975.78,4497 v1(1249,4497) v1(2475,4497) 3640.22,4497 4154,3983.22 4154,2300
  Internal Copper Layer 2 w30: v1(482,2475) M1.3 ; M4.3 v1(2475,4497)
  Internal Copper Layer 2 w50: v1(1249,4497) 1249,5002 1295.12,5048.12 1348.12,5048.12 P5.4
pads on no net: M1.13 M2.13 M3.13 M4.13

## Polygon pours and split planes (outlines as drawn)
GND on Bottom Copper Layer "GND_L04_P008" (solid, pour order 8): 0,0 4600,0 4600,5400 0,5400
GND on Top Copper Layer "GND_L01_P009" (solid, pour order 9): 4600,0 0,0 0,5400 4600,5400

## Other copper
Top Copper Layer:
  pour cut-out: 1000,1000 1000,3600 3600,3600 3600,1000
Bottom Copper Layer:
  pour cut-out: 1000,1000 1000,3600 3600,3600 3600,1000

## Silkscreen, mask and mechanical layers (free items; w line width, h text height)
Top Overlay:
  text "REF M4" at 580,3350 h60
  text "REF M4" at 3720,3350 h60
  text "REF M1" at 580,3260 h60
  text "REF M3" at 3720,3260 h60
  text "REF M1" at 570,1270 h60
  text "REF M3" at 3710,1270 h60
  text "REF M2" at 570,1180 h60
  text "REF M2" at 3710,1180 h60
Bottom Overlay:
  text "GND" at 317.43,4950.74 h100
  text "GND" at 4417.43,4950.74 h100
  text "OpenMEA" at 4050,4681.33 h120
  text "VDD  GND" at 1440.37,4627.11 h50 r270
  text "CS_P  CS_N" at 1888.55,4605.05 h50 r270
  text "CS_P  CS_N" at 2338.55,4605.05 h50 r270
  text "CS_P  CS_N" at 2788.55,4605.05 h50 r270
  text "CS_P  CS_N" at 3238.55,4605.05 h50 r270
  text "Headstage" at 4050,4562.55 h120
  text "MISO_P  MISO_N" at 1588.55,4557.77 h50 r270
  text "MOSI_P  MOSI_N" at 1688.55,4557.77 h50 r270
  text "SCLK_P  SCLK_N" at 1788.55,4558.42 h50 r270
  text "MISO_P  MISO_N" at 2038.55,4557.77 h50 r270
  text "MOSI_P  MOSI_N" at 2138.55,4557.77 h50 r270
  text "SCLK_P  SCLK_N" at 2238.55,4558.42 h50 r270
  text "MISO_P  MISO_N" at 2478.55,4557.77 h50 r270
  text "MOSI_P  MOSI_N" at 2578.55,4557.77 h50 r270
  text "SCLK_P  SCLK_N" at 2678.55,4558.42 h50 r270
  text "MISO_P  MISO_N" at 2938.55,4557.77 h50 r270
  text "MOSI_P  MOSI_N" at 3038.55,4557.77 h50 r270
  text "SCLK_P  SCLK_N" at 3138.55,4558.42 h50 r270
  text "VSTIMN  VSTIMP" at 1330.37,4557.24 h50 r270
  text "M3" at 3132.92,4440.74 h100
  text "M1" at 1783.2,4440 h100
  text "M4" at 2234.77,4440 h100
  text "M2" at 2683.43,4440 h100
  text "Jun 2023" at 4050.22,4421.33 h120

## Text inside footprints (layer, text, board x,y; h text height)
J4: Top Overlay "R11" at 1320.97,3135 h30; Top Overlay "R81" at 3164.99,3214.06 h30 r90; Top Overlay "45" at 1565,1335.96 h30 r90; Top Overlay "44" at 1335.96,3035 h30; Top Overlay "12" at 1340.96,2935 h30; Top Overlay "33" at 1335.96,2835 h30; Top Overlay "23" at 1335.96,2735 h30; Top Overlay "13" at 1340.96,2635 h30; Top Overlay "34" at 1335.96,2535 h30; Top Overlay "24" at 1335.96,2435 h30; Top Overlay "14" at 1340.96,2335 h30; Top Overlay "15" at 1340.96,2235 h30; Top Overlay "25" at 1335.96,2135 h30; Top Overlay "35" at 1335.96,2035 h30; Top Overlay "16" at 1340.96,1935 h30; Top Overlay "26" at 1335.96,1835 h30; Top Overlay "17" at 1340.96,1735 h30; Top Overlay "27" at 1335.96,1635 h30; Top Overlay "18" at 1340.96,1535 h30; Top Overlay "81" at 3214.06,3035 h30; Top Overlay "72" at 3214.06,2935 h30; Top Overlay "82" at 3214.06,2835 h30; Top Overlay "73" at 3214.06,2735 h30; Top Overlay "83" at 3214.06,2635 h30; Top Overlay "64" at 3214.06,2535 h30; Top Overlay "74" at 3214.06,2435 h30; Top Overlay "84" at 3214.06,2335 h30; Top Overlay "85" at 3214.06,2235 h30; Top Overlay "75" at 3214.06,2135 h30; Top Overlay "65" at 3214.06,2035 h30; Top Overlay "86" at 3214.06,1935 h30; Top Overlay "76" at 3214.06,1835 h30; Top Overlay "66" at 3214.06,1735 h30; Top Overlay "87" at 3214.06,1635 h30; Top Overlay "28" at 1665,1335.96 h30 r90; Top Overlay "36" at 1765,1335.96 h30 r90; Top Overlay "37" at 1865,1335.96 h30 r90; Top Overlay "38" at 1965,1335.96 h30 r90; Top Overlay "46" at 2065,1335.96 h30 r90; Top Overlay "47" at 2165,1335.96 h30 r90; Top Overlay "48" at 2265,1335.96 h30 r90; Top Overlay "58" at 2365,1335.96 h30 r90; Top Overlay "57" at 2465,1335.96 h30 r90; Top Overlay "56" at 2565,1335.96 h30 r90; Top Overlay "68" at 2665,1335.96 h30 r90; Top Overlay "67" at 2765,1335.96 h30 r90; Top Overlay "78" at 2865,1335.96 h30 r90; Top Overlay "77" at 2965,1335.96 h30 r90; Top Overlay "88" at 3065,1335.96 h30 r90; Top Overlay "11" at 1565,3214.05 h30 r90; Top Overlay "22" at 1665,3214.05 h30 r90; Top Overlay "21" at 1765,3214.05 h30 r90; Top Overlay "32" at 1865,3214.05 h30 r90; Top Overlay "31" at 1965,3214.05 h30 r90; Top Overlay "43" at 2065,3214.05 h30 r90; Top Overlay "42" at 2165,3214.05 h30 r90; Top Overlay "41" at 2265,3214.05 h30 r90; Top Overlay "51" at 2365,3214.06 h30 r90; Top Overlay "52" at 2464.99,3214.06 h30 r90; Top Overlay "53" at 2564.99,3214.06 h30 r90; Top Overlay "61" at 2665,3214.06 h30 r90; Top Overlay "62" at 2764.99,3214.06 h30 r90; Top Overlay "63" at 2864.99,3214.06 h30 r90; Top Overlay "71" at 2964.99,3214.06 h30 r90; Top Overlay "55" at 3214.06,1535 h30; Top Overlay "54" at 3064.99,3214.06 h30 r90; Top Overlay "R88" at 3214.06,1435 h30; Top Overlay "R18" at 1465,1310.97 h30 r90